# EAGLE board ecg (EAGLE 6.5.0)

Size 85 x 56 mm. Coordinates in mm from the lower left corner, seen from the top.
Copper layers (1*16): Top 0.035mm / dielectric 1.5mm / Bottom 0.035mm
Design rules "default": minimum track width 8mil, minimum drill 15mil, track to track 8mil, track to pad 8mil, pad to pad 8mil, via to via 8mil, smd to smd 8mil, copper to edge 1mil, drill to drill 8mil, minimum pad ring 10mil, minimum via ring 8mil, stop-mask expansion 4mil, vias tented up to drill 20mil, thermal gap 10mil

## Footprints (pad centres in the part's own frame; a part is rotated, then mirrored left to right if it is on the bottom)
C0603 = smd 1.1 x 1: 1 -0.85,0; 2 0.85,0
153CLV-0405 = smd 2.6 x 1.6: + 1.8,0; - -1.8,0
C0805K = smd 1.3 x 1.6: 1 -1,0; 2 1,0
C0201 = smd 0.25 x 0.35: 1 -0.25,0; 2 0.25,0
SOT23-5 = smd 0.55 x 1.2: 1 -0.95,-1.3; 2 0,-1.3; 3 0.95,-1.3; 4 0.95,1.3; 5 -0.95,1.3
LED_SML0603 = smd 0.8 x 0.8: A 0.75,0; C -0.75,0
HC49UP = smd 5.334 x 1.93: 1 -4.826,0; 2 4.826,0
R0603 = smd 1 x 1.1: 1 -0.85,0; 2 0.85,0
RASBERRYPI_SHIELD = drill 1 pad 1.676 square: 1 51.308,82.55 | drill 1 pad 1.676: 2 53.848,82.55; 3 51.308,80.01; 4 53.848,80.01; 5 51.308,77.47; 6 53.848,77.47; 7 51.308,74.93; 8 53.848,74.93; 9 51.308,72.39; 10 53.848,72.39; 11 51.308,69.85; 12 53.848,69.85; 13 51.308,67.31; 14 53.848,67.31; 15 51.308,64.77; 16 53.848,64.77; 17 51.308,62.23; 18 53.848,62.23; 19 51.308,59.69; 20 53.848,59.69; 21 51.308,57.15; 22 53.848,57.15; 23 51.308,54.61; 24 53.848,54.61; 25 51.308,52.07; 26 53.848,52.07
SOT50P160X60-6N = smd 1.118 x 0.254: 1 -0.737,0.508; 2 -0.737,0; 3 -0.737,-0.508; 4 0.737,-0.508; 5 0.737,0; 6 0.737,0.508
QFP50P1200X1200X160-64N = smd 1.676 x 0.279: 1 -5.613,3.759; 2 -5.613,3.251; 3 -5.613,2.743; 4 -5.613,2.261; 5 -5.613,1.753; 6 -5.613,1.245; 7 -5.613,0.762; 8 -5.613,0.254; 9 -5.613,-0.254; 10 -5.613,-0.762; 11 -5.613,-1.245; 12 -5.613,-1.753; 13 -5.613,-2.261; 14 -5.613,-2.743; 15 -5.613,-3.251; 16 -5.613,-3.759; 33 5.613,-3.759; 34 5.613,-3.251; 35 5.613,-2.743; 36 5.613,-2.261; 37 5.613,-1.753; 38 5.613,-1.245; 39 5.613,-0.762; 40 5.613,-0.254; 41 5.613,0.254; 42 5.613,0.762; 43 5.613,1.245; 44 5.613,1.753; 45 5.613,2.261; 46 5.613,2.743; 47 5.613,3.251; 48 5.613,3.759 | smd 0.279 x 1.676: 17 -3.759,-5.613; 18 -3.251,-5.613; 19 -2.743,-5.613; 20 -2.261,-5.613; 21 -1.753,-5.613; 22 -1.245,-5.613; 23 -0.762,-5.613; 24 -0.254,-5.613; 25 0.254,-5.613; 26 0.762,-5.613; 27 1.245,-5.613; 28 1.753,-5.613; 29 2.261,-5.613; 30 2.743,-5.613; 31 3.251,-5.613; 32 3.759,-5.613; 49 3.759,5.613; 50 3.251,5.613; 51 2.743,5.613; 52 2.261,5.613; 53 1.753,5.613; 54 1.245,5.613; 55 0.762,5.613; 56 0.254,5.613; 57 -0.254,5.613; 58 -0.762,5.613; 59 -1.245,5.613; 60 -1.753,5.613; 61 -2.261,5.613; 62 -2.743,5.613; 63 -3.251,5.613; 64 -3.759,5.613

## Placement (x,y rotation side)
C1  100n  [C0603]  2.7,40.64 270 top
C2  10uF  [153CLV-0405]  4.23,46.48 180 top
C3  100n  [C0603]  69.76,5.33 180 top
C4  10uF cer  [C0805K]  73.06,48.01 0 top
C5  [C0201]  25.82,29.72 90 top
C6  100n  [C0603]  82.71,8.89 0 top
C7  10uF cer  [C0805K]  73.06,52.83 0 top
C8  [C0201]  25.82,28.7 270 top
C9  100n  [C0603]  80.94,30.48 0 top
C10  10uF cer  [C0805K]  73.06,25.4 0 top
C11  10uF cer  [C0805K]  79.92,25.4 0 top
IC1  ADP151  [SOT23-5]  77.38,4.32 0 top
IC2  ADP151  [SOT23-5]  73.82,36.58 0 top
LED1  [LED_SML0603]  3.21,37.08 180 top
LED2  [LED_SML0603]  62.65,1.52 0 top
LED3  [LED_SML0603]  81.44,3.3 0 top
LED4  [LED_SML0603]  72.81,20.07 0 top
LED5  [LED_SML0603]  78.4,20.07 0 top
Q1  [HC49UP]  29.37,29.21 270 top
R1  1k  [R0603]  12.86,40.64 90 top
R2  1k  [R0603]  11.59,44.7 0 top
R3  1k  [R0603]  15.4,43.94 90 top
R4  1k  [R0603]  73.82,1.78 0 top
R5  1k  [R0603]  7.53,37.08 180 top
R6  1k  [R0603]  77.38,9.91 0 top
R7  1k  [R0603]  80.43,13.97 0 top
R8  10k  [R0603]  72.81,42.93 0 top
R9  1k  [R0603]  77.38,30.23 0 top
R10  1k  [R0603]  80.68,37.59 0 top
R11  10k  [R0603]  72.81,30.23 0 top
RPI  RASPBERRYPI_BB  [RASBERRYPI_SHIELD]  85,0 90 top
U1  TMP102AIDRLT  [SOT50P160X60-6N]  64.68,3.81 0 top
U2  TMP102AIDRLT  [SOT50P160X60-6N]  9.31,40.64 90 top
U3  ADAS1000BSTZ  [QFP50P1200X1200X160-64N]  18.45,27.69 90 top

## Library data of the parts
C1 C3 C6 C9 = eagle-ltspice; SPICEMODEL: NONE; SPICEPREFIX: C
C2 C4 C7 C10 C11 R1-R11 = resistor
C5 C8 = rcl
IC1 IC2 = v-reg-micrel; MF: ALTERA CORPORATION; MPN: MIC5219BM5 TR; OC_FARNELL: 1100656; OC_NEWARK: 09J8939
LED1-LED5 = eagle-ltspice; SPICEMODEL: NONE; SPICEPREFIX: D; SPICETYPE: diode
Q1 = crystal; OC_FARNELL: unknown; OC_NEWARK: unknown
RPI = microbuilder
U1 U2 = TMP102; MPN: TMP102AIDRLT; OC_FARNELL: 1652477; OC_NEWARK: 53M3987; PACKAGE: SOT-23-6; SUPPLIER: Texas Instruments
U3 = ADAS1000BSTZ; MPN: ADAS1000BSTZ; OC_FARNELL: 2213574; OC_NEWARK: 43W5448; PACKAGE: 64LQFP; SUPPLIER: ANALOG DEVICES

## Nets
+3V3: C1.1 C2.+ C3.1 R1.2 R2.2 R3.2 R5.2 R6.2 RPI.1 U1.4 U1.5 U2.5
+3V3ADCVDD: C4.1 C6.1 IC1.5 R7.2
+3V3IOVDD: C9.1 C11.1 IC2.5 R10.2
+5V: C7.1 C10.1 IC1.1 IC2.1 R4.2 R8.2 R9.2 R11.2 RPI.2
ADCVDD: U3.55
ADCVDD_2: U3.26
AGND: U3.25
AGND_2: U3.2
AGND_3: U3.15
AGND_4: U3.56
AGND_5: U3.24
AGND_6: U3.57
AVDD: U3.23
AVDD_2: U3.58
AVDD_3: U3.63
AVDD_4: U3.18
GND: C1.2 C2.- C3.2 C4.2 C5.2 C6.2 C7.2 C8.2 C9.2 C10.2 C11.2 IC1.2 IC2.2 LED1.C LED2.C LED3.C LED4.C LED5.C RPI.6 U1.2 U2.2 U2.4
IOVDD: U3.46
IOVDD_2: U3.35
N$1: R6.1 U1.3
N$2: LED1.A R5.1
N$3: LED2.A R4.1
N$4: R1.1 U2.3
N$5: LED3.A R7.1
N$6: C5.1 Q1.1 U3.28
N$7: C8.1 Q1.2 U3.27
N$8: IC1.3 R8.1
N$9: LED4.A R9.1
N$10: LED5.A R10.1
N$11: IC2.3 R11.1
SCL: R3.1 RPI.5 U1.1 U2.1
SDA: R2.1 RPI.3 U1.6 U2.6

## Tracks (layer width: path | path; a pad name or v marks a point on that pad's centre or on a via)
+3V3  (11 unrouted)
+3V3ADCVDD  (3 unrouted)
+3V3IOVDD  (3 unrouted)
+5V  (8 unrouted)
GND  (21 unrouted)
N$1  (1 unrouted)
N$2  (1 unrouted)
N$3  (1 unrouted)
N$4  (1 unrouted)
N$5  (1 unrouted)
N$6  (2 unrouted)
N$7  (2 unrouted)
N$8  (1 unrouted)
N$9  (1 unrouted)
N$10  (1 unrouted)
N$11  (1 unrouted)
SCL  (3 unrouted)
SDA  (3 unrouted)